# EAGLE board 2014_board_SPI_Pullupattiny_4 (EAGLE 6.0), part 1 of 2
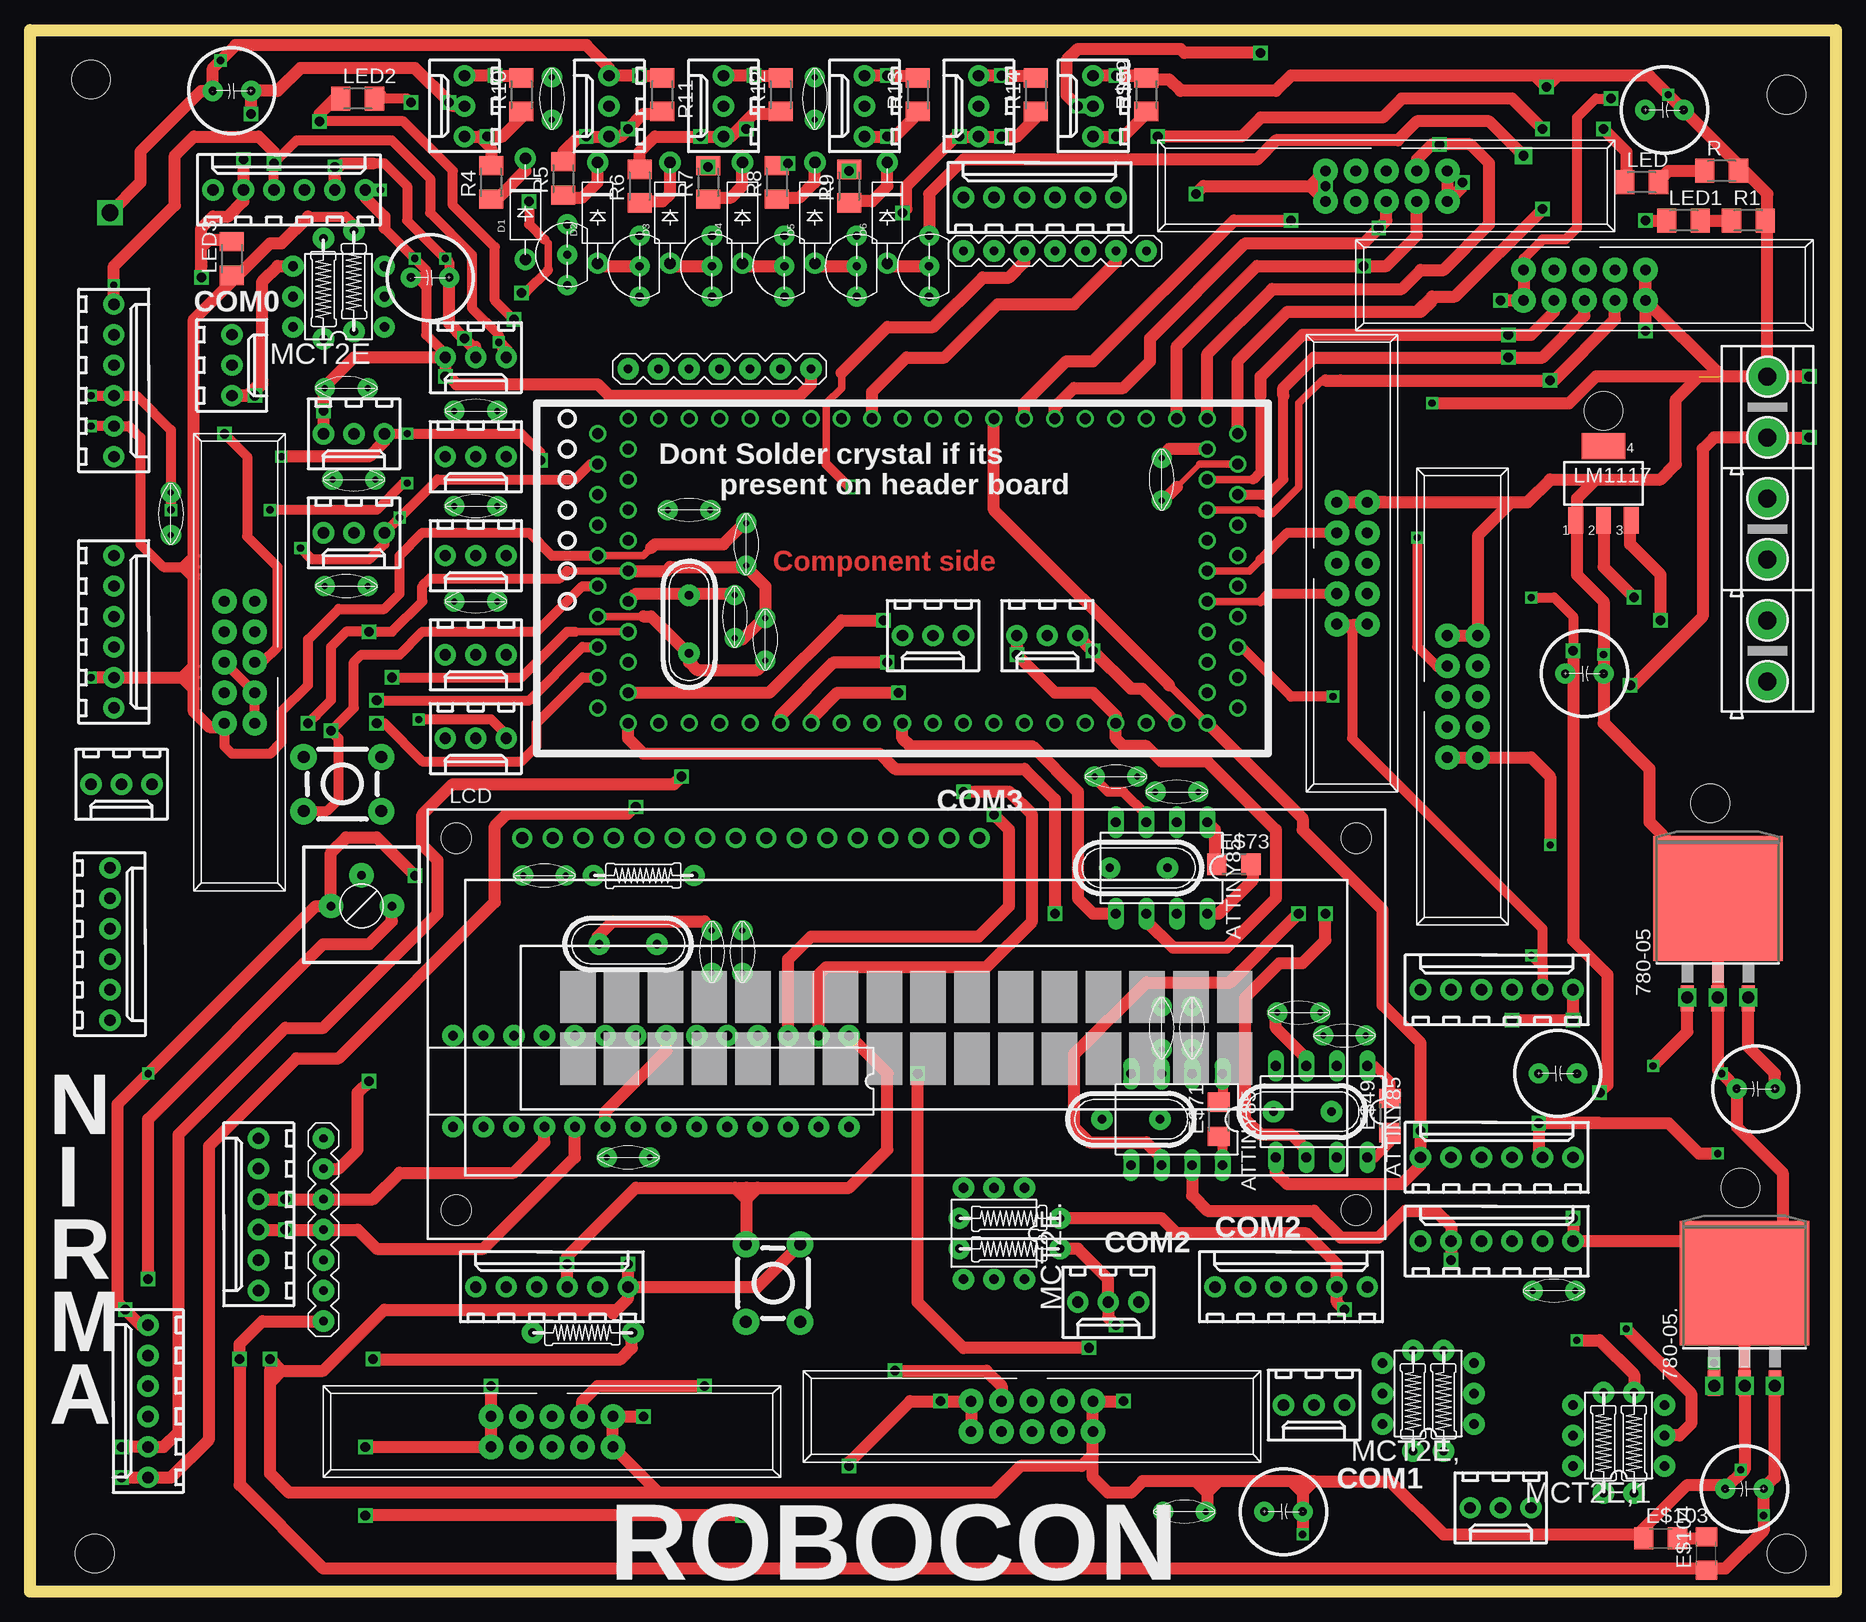
[diagram p0: board, top side]
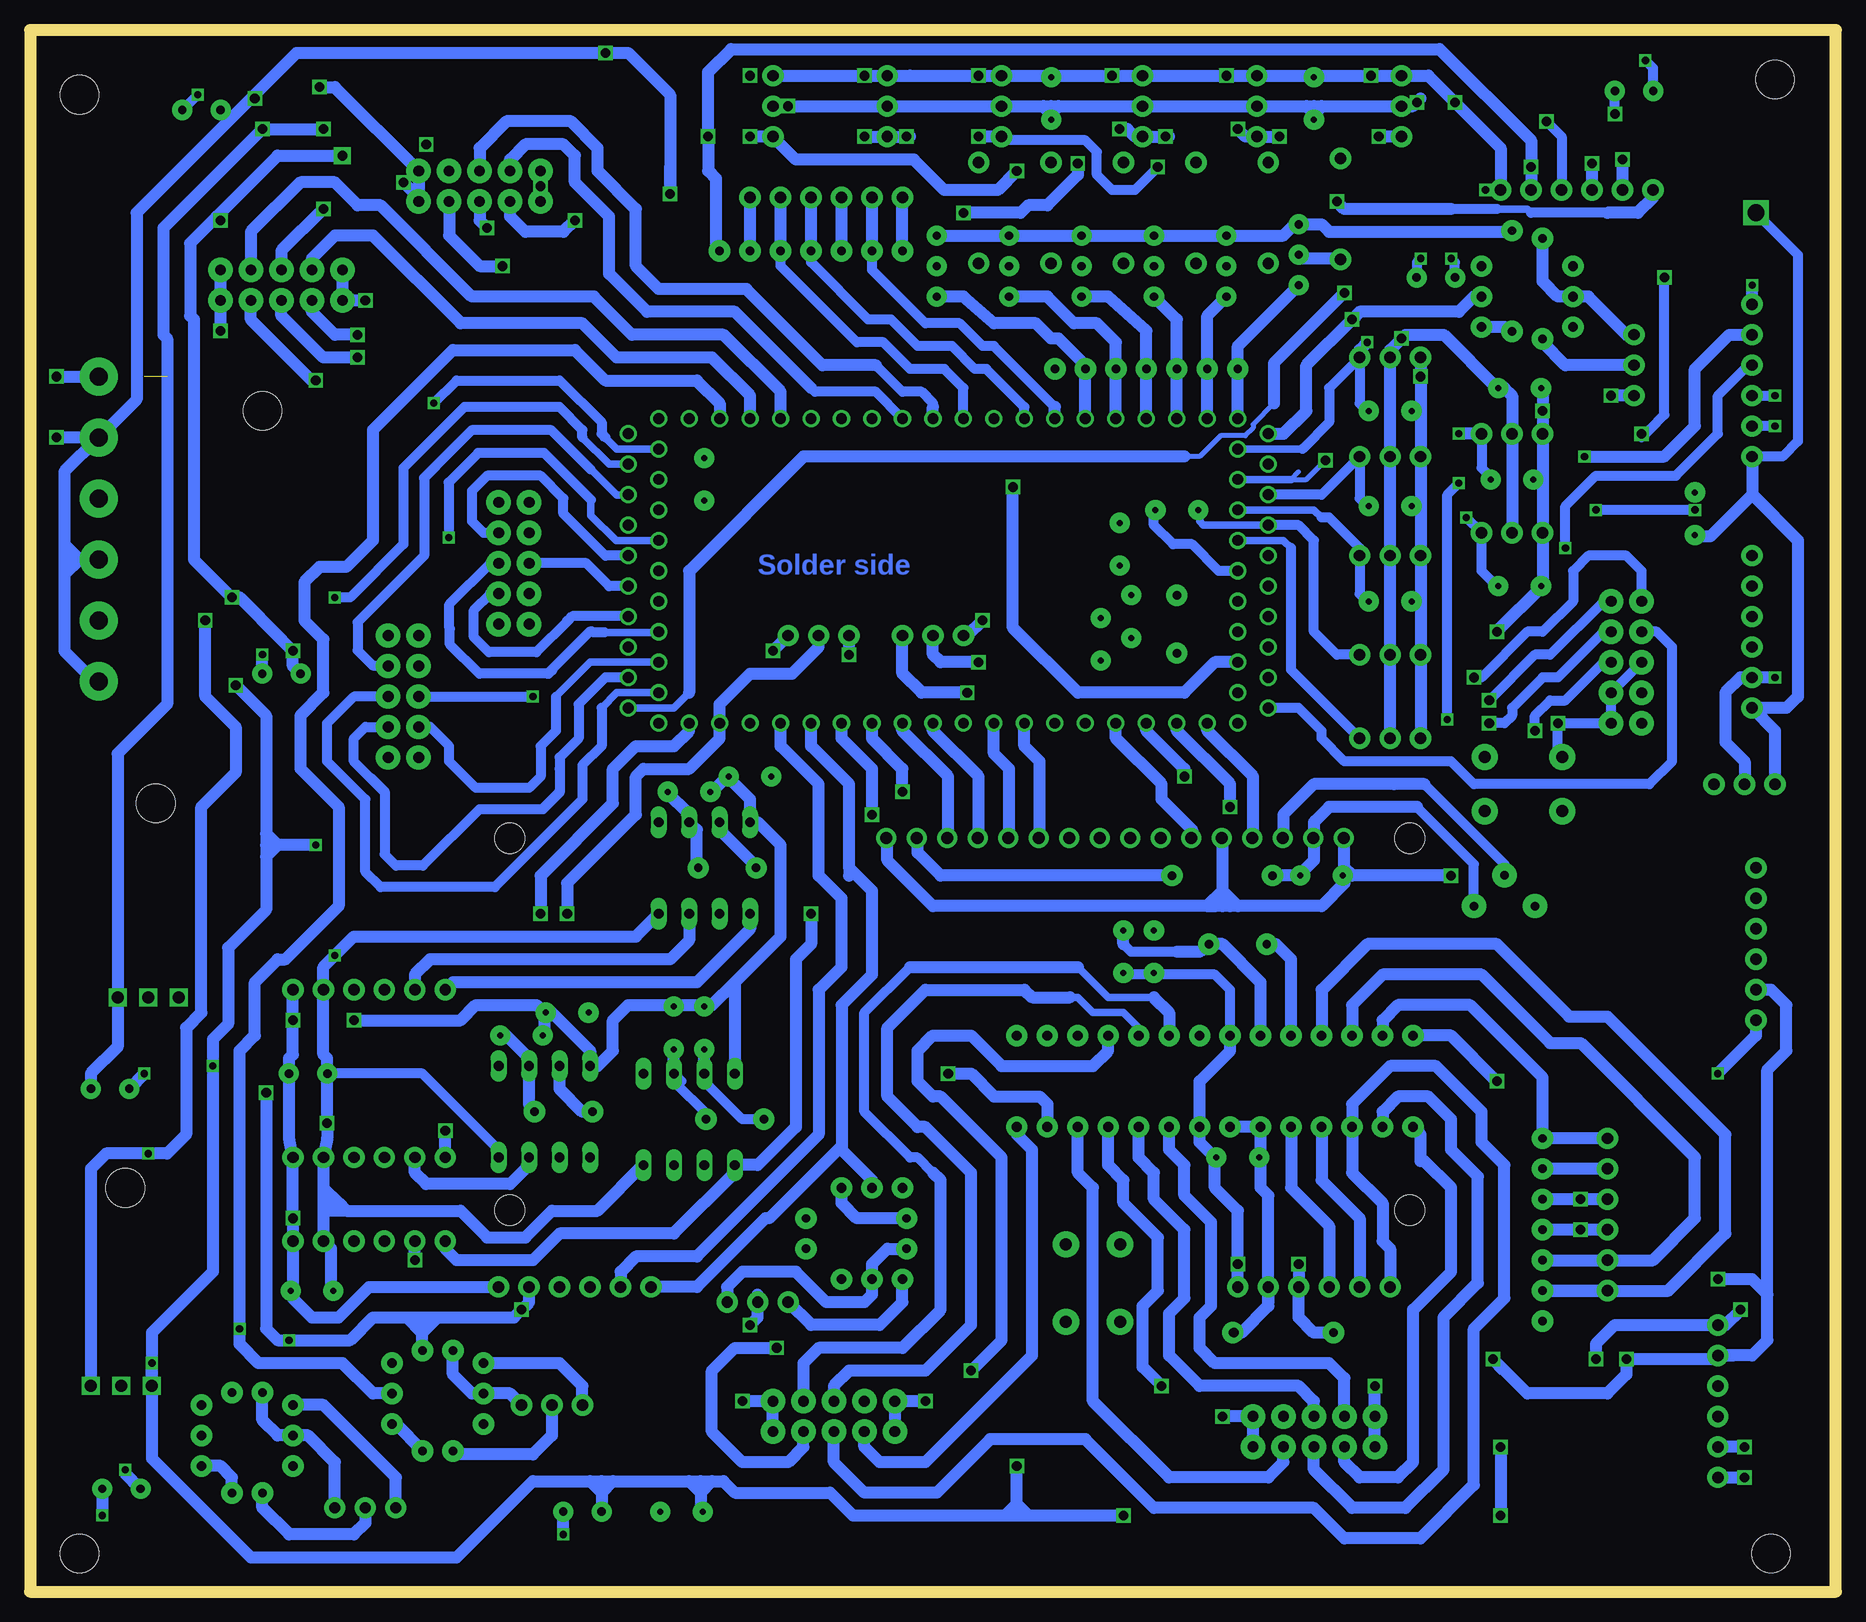
[diagram p1: board, bottom side, seen from below]

Size 150.5 x 130.18 mm. Coordinates in mm from the lower left corner, seen from the top.
Outline: 150.5,130.18 150.5,0 0,0 0,130.18 150.5,130.18
Copper layers (1*16): Top 0.035mm / dielectric 1.5mm / Bottom 0.035mm
Design rules: minimum track width 10mil, minimum drill 24mil, track to track 8mil, track to pad 8mil, pad to pad 8mil, via to via 8mil, smd to smd 8mil, copper to edge 40mil, drill to drill 8mil, minimum pad ring 10mil, minimum via ring 8mil, stop-mask expansion 4mil, vias tented up to drill 0mil, thermal gap 10mil
Holes 3.2 mm at 5.08,126.05 5.4,3.17 146.37,3.17 146.37,124.78 131.13,98.42 140.02,65.72 142.56,33.66

## Footprints (pad centres in the part's own frame; a part is rotated, then mirrored left to right if it is on the bottom)
TO263-3 = smd 1.067 x 2.159: 1 -2.54,-5.791; 2 0,-5.791; 3 2.54,-5.791 | smd 10.8 x 10.41: TAB 0,2.54
DIL08 = drill 0.813 long: 1 -3.81,-3.81; 2 -1.27,-3.81; 3 1.27,-3.81; 4 3.81,-3.81; 5 3.81,3.81; 6 1.27,3.81; 7 -1.27,3.81; 8 -3.81,3.81
DIODE(1N4007) = drill 0.95 pad 1.778: A -4.204,0; C 4.204,0
LPC1769-HEADER = drill 0.9 pad 1.422: P$1 -22.86,0; P$2 -22.86,2.54; P$3 -22.86,5.08; P$4 -22.86,7.62; P$5 -22.86,10.16; P$6 -22.86,-2.54; P$7 -22.86,-5.08; P$8 -22.86,-7.62; P$9 -22.86,-10.16; P$10 -25.4,-8.89; P$11 -25.4,-11.43; P$12 -25.4,-6.35; P$13 -25.4,-3.81; P$14 -25.4,-1.27; P$15 -25.4,1.27; P$16 -25.4,3.81; P$17 -25.4,6.35; P$18 -25.4,8.89; P$20 -22.86,12.7; P$21 -20.32,12.7; P$22 -17.78,12.7; P$23 -15.24,12.7; P$24 -12.7,12.7; P$25 -10.16,12.7; P$26 -7.62,12.7; P$27 -5.08,12.7; P$28 -2.54,12.7; P$29 0,12.7; P$30 2.54,12.7; P$31 5.08,12.7; P$32 7.62,12.7; P$33 10.16,12.7; P$34 12.7,12.7; P$35 15.24,12.7; P$36 17.78,12.7; P$37 20.32,12.7; P$38 22.86,12.7; P$39 25.4,12.7; P$40 25.4,10.16; P$41 25.4,7.62; P$42 25.4,5.08; P$43 25.4,2.54; P$44 25.4,0; P$45 25.4,-2.54; P$46 25.4,-5.08; P$47 25.4,-7.62; P$48 25.4,-10.16; P$49 25.4,-12.7; P$50 22.86,-12.7; P$51 20.32,-12.7; P$52 17.78,-12.7; P$53 15.24,-12.7; P$54 12.7,-12.7; P$55 10.16,-12.7; P$56 7.62,-12.7; P$57 5.08,-12.7; P$58 2.54,-12.7; P$59 0,-12.7; P$60 -2.54,-12.7; P$61 -5.08,-12.7; P$62 -7.62,-12.7; P$63 -10.16,-12.7; P$64 -12.7,-12.7; P$65 -15.24,-12.7; P$66 -17.78,-12.7; P$67 -20.32,-12.7; P$68 -22.86,-12.7; P$69 27.94,-11.43; P$70 27.94,-8.89; P$71 27.94,-6.35; P$72 27.94,-3.81; P$73 27.94,-1.27; P$74 27.94,1.27; P$75 27.94,3.81; P$76 27.94,6.35; P$77 27.94,8.89; P$78 27.94,11.43 | drill 0.9: P$19 -25.4,11.43
CRYSTAL = drill 0.7 pad 1.778: 1 0,-2.413; 2 0,2.413
CAPACITOR(CERAMIC) = drill 0.5 pad 1.676: 1 -1.778,0; 2 1.778,0
FRC(10) = drill 0.9 pad 2.032: 1 -5.08,-1.27; 2 -2.54,-1.27; 3 0,-1.27; 4 2.54,-1.27; 5 5.08,-1.27; 6 5.08,1.27; 7 2.54,1.27; 8 0,1.27; 9 -2.54,1.27; 10 -5.08,1.27
CONNECTOR(3_PIN) = drill 0.95 pad 1.778: 1 -2.54,0; 2 0,0; 3 2.54,0
CONNECTOR(6_PIN) = drill 0.95 pad 1.778: 1 -6.35,0; 13 -3.81,0; 14 -1.27,0; 16 1.27,0; 17 3.81,0; 18 6.35,0 | drill 0.7 pad 1.778: 2 -3.81,0; 3 -1.27,0; 4 1.27,0; 5 3.81,0; 6 6.35,0 | drill 0.8 pad 1.778: 7 -3.81,0; 8 -3.81,0; 9 -1.27,0; 10 1.27,0; 11 3.81,0; 12 6.35,0 | drill 0.9 pad 1.778: 15 1.27,0
RESISTER_ARRAY(7) = drill 0.7 pad 1.778: 1 -7.62,0; 2 -5.08,0; 3 -2.54,0; 4 0,0; 5 2.54,0; 6 5.08,0; 7 7.62,0
RESISTER(HORIZONTAL) = drill 0.7 pad 1.778: 1 -4.159,0; 2 4.223,0
CAPACITOR(ELECTROLYTE_220) = drill 0.7 pad 1.676: + -1.6,0; - 1.6,0
POT(SQAURE) = drill 0.7 pad 2.032: 1 -2.55,1.27; 2 0,3.83; 3 2.55,1.27
ATMEGA8 = drill 0.8 pad 1.778: AGND -1.27,3.81; AREF 1.27,3.81; AVCC 3.81,3.81; GND 1.27,-3.81; PB0 16.51,-3.81; PB1 16.51,3.81; PB2 13.97,3.81; PB3 11.43,3.81; PB4 8.89,3.81; PB5 6.35,3.81; PB6 3.81,-3.81; PB7 6.35,-3.81; PC0 -3.81,3.81; PC1 -6.35,3.81; PC2 -8.89,3.81; PC3 -11.43,3.81; PC4 -13.97,3.81; PC5 -16.51,3.81; PC6 -16.51,-3.81; PD0 -13.97,-3.81; PD1 -11.43,-3.81; PD2 -8.89,-3.81; PD3 -6.35,-3.81; PD4 -3.81,-3.81; PD5 8.89,-3.81; PD6 11.43,-3.81; PD7 13.97,-3.81; VCC -1.27,-3.81
R1206 = smd 1.6 x 1.803: 1 -1.422,0; 2 1.422,0
SWITCH(PUSH-BUTTON) = drill 1 pad 2.184: SW1 -2.254,3.239; SW1_ 2.254,3.239; SW2 -2.254,-3.239; SW2_ 2.254,-3.239
TRANSISTOR(TO92-HALF_ROUND) = drill 0.7 pad 1.676: B 0,0; C -2.54,0; E 2.54,0
CONNECTOR(3_PIN)' = drill 0.7 pad 1.778: P$1 -2.54,0; P$2 0,0; P$3 2.54,0
M1206 = smd 1.6 x 2: 1 -1.4,0; 2 1.4,0
C1206 = smd 1.6 x 1.8: 1 -1.4,0; 2 1.4,0
CONNECTOR(GREEN) = drill 1.5 pad 3.175: P$1 -2.54,0; P$2 2.54,0
TUXGR_16X2_R2 = drill 1 pad 1.676: 1 -32,15.5; 2 -29.46,15.5; 3 -26.92,15.5; 4 -24.38,15.5; 5 -21.84,15.5; 6 -19.3,15.5; 7 -16.76,15.5; 8 -14.22,15.5; 9 -11.68,15.5; 10 -9.14,15.5; 11 -6.6,15.5; 12 -4.06,15.5; 13 -1.52,15.5; 14 1.02,15.5; 15 3.56,15.5; 16 6.1,15.5 | hole 2.5: -37.5,-15.5; 37.5,-15.5; -37.5,15.5; 37.5,15.5
SOT223 = smd 1.219 x 2.235: 1 -2.311,-3.099; 2 0,-3.099; 3 2.311,-3.099 | smd 3.6 x 2.2: 4 0,3.099
DIL6 = drill 0.8 pad 1.778: P$1 -2.54,3.81; P$2 0,3.81; P$3 2.54,3.81; P$4 -2.54,-3.81; P$5 0,-3.81; P$6 2.54,-3.81

## Placement (x,y rotation side)
780-05  [TO263-3]  140.65,55.25 0 top
780-05.  [TO263-3]  142.88,23.18 0 top
ATTINY85  [DIL08]  107.63,40.01 180 top
ATTINY85,  [DIL08]  94.3,60.33 180 top
ATTINY85.  [DIL08]  95.57,39.37 180 top
D1  [DIODE(1N4007)]  41.27,115.25 90 top
D2  [DIODE(1N4007)]  47.31,114.93 90 top
D3  [DIODE(1N4007)]  53.34,114.93 90 top
D4  [DIODE(1N4007)]  59.37,114.93 90 top
D5  [DIODE(1N4007)]  65.41,114.93 90 top
D6  [DIODE(1N4007)]  71.44,114.93 90 top
E$1  [LPC1769-HEADER]  72.71,85.09 0 top
E$2  [CRYSTAL]  54.93,80.64 0 top
E$3  [CAPACITOR(CERAMIC)]  58.74,81.28 90 top
E$4  [CAPACITOR(CERAMIC)]  61.28,79.38 90 top
E$5  [CAPACITOR(CERAMIC)]  59.69,87.31 90 top
E$6  [CAPACITOR(CERAMIC)]  94.3,92.71 90 top
E$7  [FRC(10)]  119.38,74.61 90 top
E$8  [FRC(10)]  110.17,85.72 90 top
E$9  [CONNECTOR(3_PIN)]  84.77,79.69 0 top
E$10  [CONNECTOR(6_PIN)]  19.05,31.43 270 top
E$11  [RESISTER_ARRAY(7)]  24.45,30.16 90 top
E$12  [CONNECTOR(3_PIN)]  79.06,123.82 270 top
E$13  [RESISTER(HORIZONTAL)]  51.12,59.69 0 top
E$14  [CONNECTOR(3_PIN)]  88.58,123.82 270 top
E$15  [CAPACITOR(CERAMIC)]  42.86,59.69 0 top
E$16  [CONNECTOR(3_PIN)]  69.53,123.82 270 top
E$17  [CONNECTOR(3_PIN)]  57.79,123.82 270 top
E$18  [CRYSTAL]  92.39,60.33 90 top
E$19  [CAPACITOR(CERAMIC)]  95.57,66.67 0 top
E$20  [CAPACITOR(CERAMIC)]  90.49,67.94 0 top
E$21  [CONNECTOR(6_PIN)]  122.24,50.16 180 top
E$22  [CONNECTOR(6_PIN)]  122.24,36.2 180 top
E$23  [CONNECTOR(6_PIN)]  122.24,29.21 180 top
E$24  [CAPACITOR(ELECTROLYTE_220)]  127.32,43.18 0 top
E$25  [CAPACITOR(CERAMIC)]  105.73,48.26 0 top
E$26  [CAPACITOR(CERAMIC)]  109.54,46.36 0 top
E$27  [CRYSTAL]  106.05,40.01 90 top
E$28  [CAPACITOR(CERAMIC)]  94.3,46.99 90 top
E$29  [CAPACITOR(CERAMIC)]  96.84,46.99 90 top
E$30  [CRYSTAL]  91.76,39.37 90 top
E$31  [CAPACITOR(CERAMIC)]  127,25.08 180 top
E$32  [CONNECTOR(6_PIN)]  105.09,25.4 180 top
E$33  [CONNECTOR(3_PIN)]  48.26,123.82 270 top
E$34  [RESISTER(HORIZONTAL)]  81.6,31.11 0 top
E$35  [CONNECTOR(3_PIN)]  89.85,24.13 0 top
E$36  [RESISTER(HORIZONTAL)]  81.6,28.57 0 top
E$37  [CONNECTOR(6_PIN)]  9.84,15.88 270 top
E$38  [POT(SQAURE)]  27.62,55.88 0 top
E$39  [CAPACITOR(CERAMIC)]  49.85,36.2 0 top
E$40  [CRYSTAL]  49.85,53.98 90 top
E$41  [ATMEGA8]  51.75,42.55 180 top
E$42  [CAPACITOR(CERAMIC)]  56.83,53.34 90 top
E$43  [CAPACITOR(CERAMIC)]  59.37,53.34 90 top
E$44  [CONNECTOR(6_PIN)]  43.5,25.4 180 top
E$45  [RESISTER(HORIZONTAL)]  46.04,21.59 0 top
E$46  [FRC(10)]  83.5,14.61 0 top
E$47  [FRC(10)]  43.5,13.34 0 top
E$48  [CONNECTOR(3_PIN)]  75.25,79.69 0 top
E$49  [R1206]  113.35,39.69 90 top
E$50  [CONNECTOR(3_PIN)]  37.15,71.12 0 top
E$51  [CAPACITOR(CERAMIC)]  37.15,98.42 0 top
E$52  [CONNECTOR(3_PIN)]  37.15,78.1 0 top
E$53  [CONNECTOR(3_PIN)]  37.15,86.36 0 top
E$54  [CONNECTOR(3_PIN)]  37.15,94.61 0 top
E$55  [CONNECTOR(3_PIN)]  37.15,102.87 0 top
E$56  [FRC(10)]  17.46,77.47 270 top
E$57  [CAPACITOR(CERAMIC)]  26.35,100.33 0 top
E$58  [CONNECTOR(3_PIN)]  26.99,96.52 0 top
E$59  [CONNECTOR(3_PIN)]  26.99,88.27 0 top
E$60  [CONNECTOR(3_PIN)]  16.83,102.23 90 top
E$61  [CAPACITOR(CERAMIC)]  37.15,90.49 0 top
E$62  [CAPACITOR(CERAMIC)]  37.15,82.55 0 top
E$63  [SWITCH(PUSH-BUTTON)]  26.04,67.31 90 top
E$64  [FRC(10)]  129.54,108.9 0 top
E$65  [FRC(10)]  113.03,117.16 0 top
E$66  [CAPACITOR(CERAMIC)]  26.99,92.71 0 top
E$67  [CAPACITOR(CERAMIC)]  26.35,83.82 0 top
E$68  [CONNECTOR(3_PIN)]  36.2,123.82 270 top
E$69  [RESISTER(HORIZONTAL)]  24.45,108.58 90 top
E$70  [RESISTER(HORIZONTAL)]  26.99,109.22 90 top
E$71  [R1206]  99.06,39.37 90 top
E$72  [RESISTER_ARRAY(7)]  57.47,101.92 0 top
E$73  [R1206]  100.33,60.64 0 top
E$74  [RESISTER(HORIZONTAL)]  117.79,15.88 90 top
E$75  [RESISTER(HORIZONTAL)]  115.25,15.88 90 top
E$76  [CONNECTOR(3_PIN)]  107,15.56 0 top
E$77  [TRANSISTOR(TO92-HALF_ROUND)]  44.77,111.44 270 top
E$78  [TRANSISTOR(TO92-HALF_ROUND)]  50.8,110.49 270 top
E$79  [TRANSISTOR(TO92-HALF_ROUND)]  56.83,110.49 270 top
E$80  [TRANSISTOR(TO92-HALF_ROUND)]  62.87,110.49 270 top
E$81  [TRANSISTOR(TO92-HALF_ROUND)]  68.9,110.49 270 top
E$82  [TRANSISTOR(TO92-HALF_ROUND)]  74.93,110.49 270 top
E$83  [CONNECTOR(6_PIN)]  6.99,100.96 90 top
E$84  [CONNECTOR(6_PIN)]  21.59,116.84 180 top
E$85  [CAPACITOR(CERAMIC)]  11.75,89.85 90 top
E$86  [CAPACITOR(CERAMIC)]  54.93,90.17 180 top
E$87  [CONNECTOR(6_PIN)]  6.99,80.01 90 top
E$88  [CONNECTOR(6_PIN)]  6.67,53.98 90 top
E$89  [CONNECTOR(3_PIN)]  7.62,67.31 0 top
E$90  [CAPACITOR(ELECTROLYTE_220)]  33.34,109.54 180 top
E$91  [CONNECTOR(3_PIN)]  36.2,123.82 270 top
E$92  [CONNECTOR(3_PIN)']  48.26,123.82 270 top
E$93  [CONNECTOR(3_PIN)']  57.79,123.82 270 top
E$94  [CONNECTOR(3_PIN)']  69.53,123.82 270 top
E$95  [RESISTER(HORIZONTAL)]  117.79,15.88 90 top
E$96  [CONNECTOR(3_PIN)']  88.58,123.82 270 top
E$97  [CAPACITOR(CERAMIC)]  43.5,124.46 90 top
E$98  [CAPACITOR(CERAMIC)]  65.41,124.46 90 top
E$99  [M1206]  93.03,124.78 90 top
E$100  [RESISTER(HORIZONTAL)]  133.67,12.38 90 top
E$101  [RESISTER(HORIZONTAL)]  131.13,12.38 90 top
E$102  [CONNECTOR(3_PIN)]  122.55,6.99 0 top
E$103  [C1206]  135.89,4.45 0 top
E$104  [C1206]  139.7,3.17 90 top
E$106  [CONNECTOR(6_PIN)]  84.14,116.2 180 top
E$107  [SWITCH(PUSH-BUTTON)]  61.91,25.72 0 top
E$108  [CONNECTOR(GREEN)]  144.78,98.74 270 top
E$109  [CONNECTOR(GREEN)]  144.78,88.58 270 top
E$110  [CONNECTOR(GREEN)]  144.78,78.42 270 top
E$113  [RESISTER_ARRAY(7)]  85.41,111.76 0 top
E$118  [CAPACITOR(ELECTROLYTE_220)]  136.21,123.51 0 top
E$119  [CAPACITOR(ELECTROLYTE_220)]  129.54,76.52 0 top
E$120  [CAPACITOR(ELECTROLYTE_220)]  143.83,41.91 180 top
E$121  [CAPACITOR(ELECTROLYTE_220)]  142.88,8.57 180 top
E$141  [CAPACITOR(ELECTROLYTE_220)]  16.83,125.09 180 top
E$144  [CAPACITOR(ELECTROLYTE_220)]  104.46,6.67 0 top
E$145  [CAPACITOR(CERAMIC)]  96.2,6.67 180 top
LCD  [TUXGR_16X2_R2]  73.02,47.31 0 top
LED  [M1206]  134.3,117.47 0 top
LED1  [M1206]  137.8,114.3 0 top
LED2  [M1206]  27.3,124.46 0 top
LED3  [M1206]  16.83,111.12 90 top
LM1117  [SOT223]  131.13,92.39 0 top
MCT2E  [DIL6]  25.72,107.95 90 top
MCT2E,  [DIL6]  116.52,16.51 90 top
MCT2E,1  [DIL6]  132.4,13.02 90 top
MCT2E.  [DIL6]  80.33,29.84 180 top
R  [M1206]  140.97,118.43 0 top
R1  [M1206]  143.19,114.3 0 top
R4  [M1206]  38.42,117.47 90 top
R5  [M1206]  44.45,117.79 90 top
R6  [M1206]  50.8,117.16 90 top
R7  [M1206]  56.52,117.47 90 top
R8  [M1206]  62.23,117.47 90 top
R9  [M1206]  68.26,117.16 90 top
R10  [M1206]  40.96,124.78 90 top
R11  [M1206]  52.71,124.78 270 top
R12  [M1206]  62.55,124.78 90 top
R13  [M1206]  73.98,124.78 90 top
R14  [M1206]  83.82,124.78 90 top
R15  [M1206]  93.03,124.78 90 top

## Library data of the parts
780-05 780-05. LM1117 = linear
ATTINY85 ATTINY85, ATTINY85. MCT2E MCT2E, MCT2E,1 MCT2E. = 74ac-logic
D1-D6 E$1-E$48 E$50-E$70 E$72 E$74-E$91 E$95 E$100-E$102 E$106-E$110 E$113 E$118-E$121 E$141 E$144 E$145 = ROBOCON
E$49 E$71 E$73 E$99 E$103 E$104 LED LED1-LED3 R R1 R4-R15 = smd-ipc
E$92-E$94 E$96-E$98 = ROBOCON_
LCD = display-lcd

## Nets
3.3V: E$1.P$15 E$1.P$77 E$32.2 E$56.5 E$77.C E$78.C E$79.C E$80.C E$81.C E$82.C E$83.2 E$87.2 E$89.2
5V_PERIPHERALS: ATTINY85,.8 ATTINY85.8 ATTINY85..8 E$8.1 E$8.10 E$11.1 E$21.2 E$22.2 E$23.2 E$37.2 E$41.AREF E$41.AVCC E$41.VCC E$44.2 E$88.2
5V_SHARP: E$50.2 E$52.2 E$53.2 E$54.2 E$55.2 E$58.2 E$59.2 E$84.2 E$113.7
12V: E$7.10 E$46.1 E$46.10 E$47.1 E$47.10 E$65.1 E$65.10 E$91.2 E$92.P$2 E$93.P$2 E$94.P$2 E$96.P$2 E$108.P$2 E$109.P$2 E$110.P$2
GND: ATTINY85,.4 ATTINY85.4 ATTINY85..4 E$1.P$1 E$1.P$40 E$8.5 E$8.6 E$21.1 E$22.1 E$23.1 E$32.1 E$37.1 E$41.AGND E$41.GND E$44.1 E$46.5 E$46.6 E$47.5 E$47.6 E$50.1 E$52.1 E$53.1 E$54.1 E$55.1 E$56.3 E$56.6 E$56.7 E$58.1 E$59.1 E$64.5 E$64.6 E$65.5 E$65.6 E$72.7 E$83.1 E$84.1 E$87.1 E$88.1 E$89.1 E$91.1 E$92.P$1 E$93.P$1 E$94.P$1 E$96.P$1 E$108.P$1
S$1: E$10.6 E$11.2 E$41.PD5
S$2: ATTINY85..7 E$23.5
S$3: MCT2E,.P$4
S$4: E$1.P$13
S$5: E$1.P$6
S$6: E$1.P$44 E$8.7
S$8: ATTINY85,.6 E$1.P$52 E$9.1
S$9: E$1.P$36 E$64.9
S$10: E$1.P$74 E$8.4
S$11: E$1.P$43
S$13: E$1.P$48 E$7.3
S$14: E$10.3 E$11.5 E$41.PB4 E$44.5
S$15: E$7.2
S$16: E$10.4 E$11.4 E$41.PB5 E$44.4
S$17: E$1.P$47 E$7.9
S$19: E$1.P$73 E$8.8
S$21: E$1.P$42 E$64.4
S$22: E$1.P$45 E$8.9
S$24: E$1.P$71 E$7.8
S$25: E$1.P$41 E$64.2
S$27: E$1.P$70
S$29: E$102.2
S$33: E$7.5 E$7.6
S$34: ATTINY85.5 E$1.P$32 E$1.P$49 E$22.6
S$35: E$1.P$67
S$36: E$35.2
S$37: E$1.P$57
S$38: E$1.P$58
S$39: E$1.P$60
S$40: E$1.P$61
S$41: E$76.3 MCT2E,.P$2
S$44: E$1.P$5 E$55.3 E$83.6 E$84.4
S$45: E$1.P$55 E$41.PD1
S$46: ATTINY85,.3
S$48: ATTINY85.7 E$22.5
S$49: E$41.PC4 E$46.4
S$50: ATTINY85.2
S$51: ATTINY85,.7 E$21.5
S$52: ATTINY85..6 E$1.P$51 E$9.2
S$53: ATTINY85..5 E$1.P$68 E$23.6
S$54: ATTINY85.6 E$1.P$50 E$9.3
S$55: E$1.P$66 E$37.6
S$57: E$1.P$53 E$32.5
S$58: ATTINY85,.2
S$59: ATTINY85.3
S$60: E$1.P$20 E$72.1 E$77.E
S$61: MCT2E..P$4
S$62: ATTINY85,.5 E$1.P$59 E$21.6
S$63: ATTINY85..1
S$64: E$64.1 E$64.10
S$65: E$1.P$9 E$48.1
S$66: ATTINY85..3
S$67: E$102.1 MCT2E,1.P$3
S$68: E$1.P$27 E$106.3 E$113.4
S$69: E$102.3 MCT2E,1.P$2
S$70: MCT2E..P$2
S$71: E$35.1 MCT2E..P$3
S$74: E$35.3
S$75: E$1.P$11 E$56.2
S$76: E$1.P$29 E$106.2 E$113.5
S$77: E$41.PB7
S$78: E$41.PD4 E$46.7
S$80: E$41.PB6
S$81: E$41.PC5 E$46.2
S$82: ATTINY85.1
S$83: E$1.P$62 E$48.3
S$85: E$41.PB3 E$44.6 E$46.3
S$86: E$1.P$63 E$48.2
S$87: E$41.PD3 E$46.8
S$88: E$1.P$4 E$58.3 E$83.5
S$89: ATTINY85,.1
S$90: E$1.P$56 E$41.PD0
S$91: E$1.P$34 E$65.3
S$93: E$41.PC6 E$44.3
S$94: E$41.PC2 E$47.7
S$95: E$41.PC0 E$47.9
S$96: E$41.PB2 E$47.3
S$97: E$41.PC3 E$47.4
S$98: E$41.PB1 E$47.2
S$99: E$41.PD2 E$46.9
S$100: E$1.P$54 E$32.6 MCT2E..P$5
S$101: E$10.2 E$11.6 E$41.PB0
S$102: ATTINY85..2
S$103: E$10.1 E$11.7 E$41.PD7
S$104: E$11.3 E$41.PD6
S$105: E$1.P$2 E$50.3 E$83.3
S$106: E$96.P$3
S$107: E$1.P$65 E$37.5
S$110: E$1.P$18 E$59.3 E$83.4
S$112: E$1.P$21 E$72.2 E$78.E
S$113: E$1.P$16 E$52.3
S$116: E$60.1 MCT2E.P$3
S$118: E$1.P$7 E$56.1
S$120: E$60.2
S$121: E$1.P$12 E$56.10
S$122: E$1.P$10 E$56.9
S$123: E$1.P$17 E$54.3
S$124: E$1.P$3 E$53.3
S$126: E$60.3 MCT2E.P$2
S$127: MCT2E.P$4
S$128: E$1.P$23 E$72.4 E$80.E
S$129: E$1.P$22 E$72.3 E$79.E
S$130: E$1.P$19 E$84.3 MCT2E.P$5
S$131: E$78.B
S$134: E$76.1 MCT2E,.P$3
S$135: E$1.P$37 MCT2E,1.P$5 MCT2E,.P$5
S$137: E$76.2
S$140: E$1.P$14 E$56.8 E$84.5
S$142: E$1.P$24 E$72.5 E$81.E
S$143: E$1.P$25 E$82.E
S$144: E$91.3
S$145: E$92.P$3
S$146: E$93.P$3
S$148: E$94.P$3
S$156: E$1.P$64
S$161: E$1.P$76 E$64.3
S$163: E$1.P$39 E$65.7
S$164: E$1.P$38 E$65.4
S$165: E$1.P$33 E$65.2
S$166: E$1.P$35 E$64.7
S$167: E$41.PC1 E$47.8
S$168: E$1.P$31 E$65.9
S$169: E$1.P$30 E$65.8
S$170: E$1.P$78
S$171: E$1.P$8 E$106.4 E$113.3
S$172: E$79.B
S$173: E$80.B
S$174: E$81.B
S$175: E$82.B
S$176: E$77.B
S$177: E$1.P$69 E$84.6
S$179: E$1.P$26 E$106.5 E$113.2
S$181: E$1.P$28 E$106.1 E$113.6
S$185: E$106.6 E$113.1